# EAGLE board LineFollowingRobotCircuit (EAGLE 9.7.0)

Size 204.07 x 166.77 mm. Coordinates in mm from the lower left corner, seen from the top.
Outline: 0,0 204.07,0 204.07,166.77 0,166.77 0,0
Copper layers (1*16): Top 0.035mm / dielectric 1.5mm / Bottom 0.035mm
Design rules "default": minimum track width 6mil, minimum drill 0.35mm, track to track 6mil, track to pad 6mil, pad to pad 6mil, via to via 6mil, smd to smd 6mil, copper to edge 40mil, drill to drill 6mil, minimum pad ring 10mil, minimum via ring 8mil, stop-mask expansion 4mil, vias tented up to drill 0mil, thermal gap 10mil

## Footprints (pad centres in the part's own frame; a part is rotated, then mirrored left to right if it is on the bottom)
DIODE-AXIAL = drill 1: 1 -5.08,0; 2 5.08,0
DG01D = drill 1.118 pad 3.15 octagon: + 2.54,0; - -2.54,0
28027 = drill 1.016 long: 1 -2.54,0; 2 0,0; 3 2.54,0
ARDUINO-UNO-R3-SHIELD = drill 1.016 pad 1.88: 3.3V 24.13,-2.54; 5V 24.13,0; A0 24.13,12.7; A1 24.13,15.24; A2 24.13,17.78; A3 24.13,20.32; A4 24.13,22.86; A5 24.13,25.4; AREF -24.13,-13.97; D2 -24.13,20.32; D3 -24.13,17.78; D4 -24.13,15.24; D5 -24.13,12.7; D6 -24.13,10.16; D7 -24.13,7.62; D8 -24.13,3.81; D9 -24.13,1.27; D10 -24.13,-1.27; D11 -24.13,-3.81; D12 -24.13,-6.35; D13 -24.13,-8.89; GND@0 24.13,2.54; GND@1 24.13,5.08; GND@2 -24.13,-11.43; IOREF 24.13,-7.62; NC 24.13,-10.16; RES 24.13,-5.08; RX -24.13,25.4; SCL -24.13,-19.05; SDA -24.13,-16.51; TX -24.13,22.86; VIN 24.13,7.62
TSOP48 = drill 0.8: 1 -2.54,0; 2 0,0; 3 2.54,0
DIP762W53P254L1969H508Q16B = drill 0.743 pad 1.343: 1 -3.81,8.89; 2 -3.81,6.35; 3 -3.81,3.81; 4 -3.81,1.27; 5 -3.81,-1.27; 6 -3.81,-3.81; 7 -3.81,-6.35; 8 -3.81,-8.89; 9 3.81,-8.89; 10 3.81,-6.35; 11 3.81,-3.81; 12 3.81,-1.27; 13 3.81,1.27; 14 3.81,3.81; 15 3.81,6.35; 16 3.81,8.89

## Placement (x,y rotation side)
D1  DIODEDIODE-AXIAL  [DIODE-AXIAL]  152.72,65.49 180 top
D2  DIODEDIODE-AXIAL  [DIODE-AXIAL]  150.18,62.95 0 top
D3  DIODEDIODE-AXIAL  [DIODE-AXIAL]  152.72,88.35 180 top
D4  DIODEDIODE-AXIAL  [DIODE-AXIAL]  150.18,90.89 0 top
D5  DIODEDIODE-AXIAL  [DIODE-AXIAL]  117.16,90.89 0 top
D6  DIODEDIODE-AXIAL  [DIODE-AXIAL]  117.16,62.95 0 top
D7  DIODEDIODE-AXIAL  [DIODE-AXIAL]  114.62,88.35 180 top
D8  DIODEDIODE-AXIAL  [DIODE-AXIAL]  114.62,65.49 180 top
M1  MOTOR_DG01D  [DG01D]  176.8,82.99 180 top
M2  MOTOR_DG01D  [DG01D]  99.25,74.3 0 top
PIR1  PIR-SENSOR_28027  [28027]  143.69,160.24 0 top
PIR2  PIR-SENSOR_28027  [28027]  183.12,160.42 0 top
U1  ARDUINO-UNO-R3-SHIELD  [ARDUINO-UNO-R3-SHIELD]  47.88,92.2 270 top
U2  IR-RECEIVERTSOP48  [TSOP48]  109.95,145.96 0 top
U3  L293E  [DIP762W53P254L1969H508Q16B]  133.67,76.92 0 top

## Library data of the parts
D1-D8 M1 M2 PIR1 PIR2 U1-U3 = Tinkercad

## Nets
M1_+: D1.2 D2.1 M1.+ U3.11
M1_-: D3.2 D4.1 M1.- U3.14
M2_+: D5.2 D7.1 M2.+ U3.3
M2_-: D6.2 D8.1 M2.- U3.6
U1_5V: D2.2 D4.2 D7.2 D8.2 PIR1.2 PIR2.2 U1.5V U2.3 U3.8 U3.16
U1_A0: U1.A0 U2.1
U1_A1: PIR1.1 U1.A1
U1_A2: PIR2.1 U1.A2
U1_D3: U1.D3 U3.15
U1_D7: U1.D7 U3.2
U1_D9: U1.D9 U3.10
U1_D10: U1.D10 U3.1
U1_D11: U1.D11 U3.7
U1_D12: U1.D12 U3.9
U1_GND: D1.1 D3.1 D5.1 D6.1 PIR1.3 PIR2.3 U1.GND@0 U1.GND@1 U1.GND@2 U2.2 U3.4 U3.5 U3.12 U3.13

## Tracks (layer width: path | path; a pad name or v marks a point on that pad's centre or on a via)
M1_+  (3 unrouted)
M1_-  (3 unrouted)
M2_+  (3 unrouted)
M2_-  (3 unrouted)
U1_5V  (9 unrouted)
U1_A0  (1 unrouted)
U1_A1  (1 unrouted)
U1_A2  (1 unrouted)
U1_D3  (1 unrouted)
U1_D7  (1 unrouted)
U1_D9  (1 unrouted)
U1_D10  (1 unrouted)
U1_D11  (1 unrouted)
U1_D12  (1 unrouted)
U1_GND  (13 unrouted)